# Altium PCB PCB CZAR Li-Ion Batt BOT.PcbDoc
Units mm, origin at the board's own origin, x right, y up, seen from the top; angles counter-clockwise.
Board outline 254 x 160 mm, 2 copper layers (L1, L2), stack 1.671 mm thick; 104 components, 48 nets, 345 pads, 0 vias.
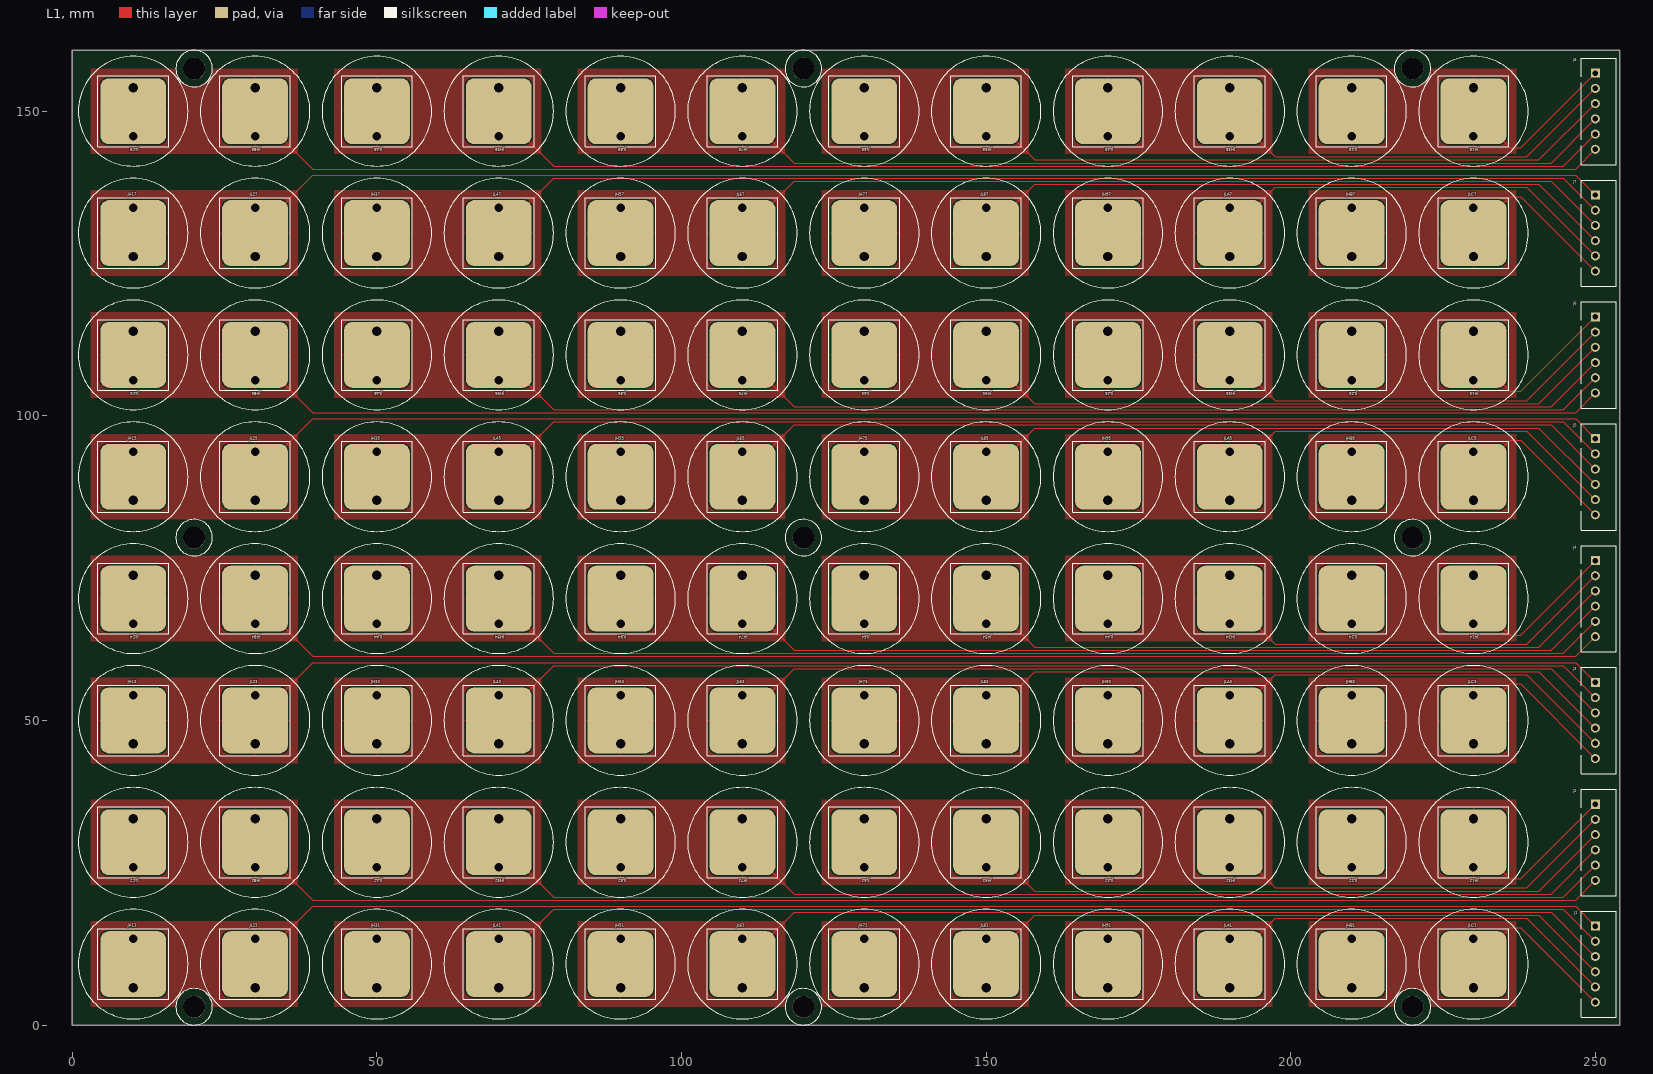
[diagram p0: L1 view]
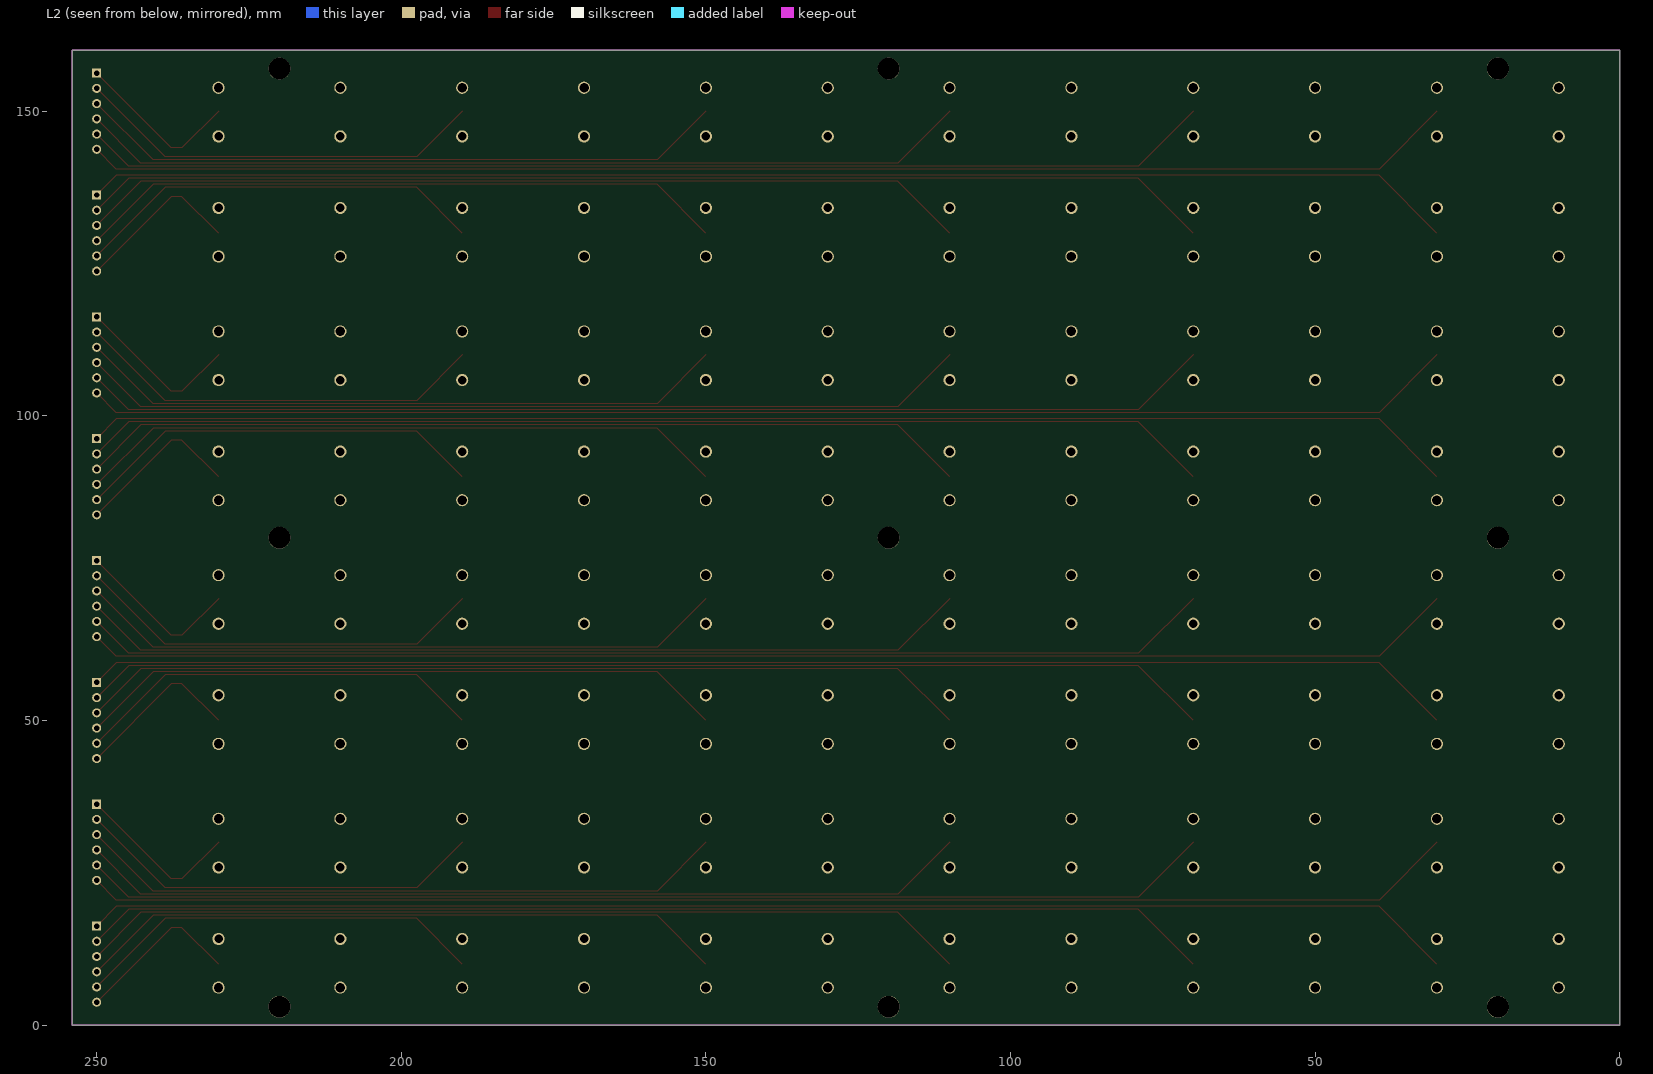
[diagram p1: L2 view, seen from below]

## Layer stack, top to bottom
L1: signal copper 0.0356
Dielectric: core 1.6, FR-4, Dk 4.8
L2: signal copper 0.0356

## Board outline
0,160 0,0 254,0 254,160

## Design rules (kind name [scope] priority, off if disabled: settings)
AssemblyTestPointUsage [All] p1: valid=2
AssemblyTestpoint [All] p1: testpointundercomponent=TRUE minsize=0.5 maxsize=2.54 preferedsize=1.524 minholesize=0 maxholesize=1.016 preferedholesize=0.813 testpointgrid=0.025 usegrid=FALSE gridtolerance=0 allowsidetop=TRUE allowsidebottom=TRUE
Clearance "Mounting Holes" [HoleSize = 3.6] p1: gap=1.2
Clearance LV2LV [All] p2: gap=0.2
ComponentClearance [All] p1: gap=0.2 collisioncheckmode=3 verticalgap=0.2 showdistances=FALSE
DiffPairsRouting [All] p1: maxlimit=2 minlimit=0.2 mostfreqgap=0.2 maxuncoupledlength=12.7
FabricationTestPointUsage [All] p1: valid=2 allowmultiple=FALSE
FabricationTestpoint [All] p1: side=3 testpointundercomponent=TRUE minsize=0.5 maxsize=2.54 preferedsize=1.524 minholesize=0 maxholesize=1.016 preferedholesize=0.813 testpointgrid=0.025 allowsidetop=TRUE allowsidebottom=TRUE usegrid=FALSE gridtolerance=0
Height [All] p1: minheight=0 maxheight=60 prefheight=12.7
HoleSize [All] p1: absolutevalues=TRUE maxlimit=25 minlimit=0.05 maxpercent=80.000 minpercent=20.000
HoleToHoleClearance [All] p1: gap=0.2 allowstackedmicrovias=TRUE
MinimumSolderMaskSliver [All] p1: minsoldermaskwidth=0.01
PlaneClearance [All] p1: clearance=0.5
PlaneConnect [All] p1: planeconnectstyle=Relief reliefexpansion=0.5 reliefentries=4 reliefconductorwidth=0.25 reliefairgap=0.25
PolygonConnect PolyConnect [All vs IsPolygon] p1: connectstyle=Relief reliefconductorwidth=0.2 reliefentries=4 polygonreliefangle="90 Angle"
RoomDefinition 8 [InComponentClass('8')] p1: confinementstyle=ConfineIn formatcopy=TRUE lockcomponents=FALSE outline 240,160 0,160 0,140 240,140
RoomDefinition 7 [InComponentClass('7')] p2: confinementstyle=ConfineIn formatcopy=TRUE lockcomponents=FALSE outline 0,120 240,120 240,140 0,140
RoomDefinition 6 [InComponentClass('6')] p3: confinementstyle=ConfineIn formatcopy=TRUE lockcomponents=FALSE outline 240,120 0,120 0,100 240,100
RoomDefinition 5 [InComponentClass('5')] p4: confinementstyle=ConfineIn formatcopy=TRUE lockcomponents=FALSE outline 0,80 240,80 240,100 0,100
RoomDefinition 4 [InComponentClass('4')] p5: confinementstyle=ConfineIn formatcopy=TRUE lockcomponents=FALSE outline 240,80 0,80 0,60 240,60
RoomDefinition 3 [InComponentClass('3')] p6: confinementstyle=ConfineIn formatcopy=TRUE lockcomponents=FALSE outline 0,40 240,40 240,60 0,60
RoomDefinition 2 [InComponentClass('2')] p7: confinementstyle=ConfineIn formatcopy=TRUE lockcomponents=FALSE outline 240,40 0,40 0,20 240,20
RoomDefinition 1 [InComponentClass('1')] p8: confinementstyle=ConfineIn formatcopy=TRUE lockcomponents=FALSE outline 0,0 240,0 240,20 0,20
RoutingVias [All] p1: holewidth=0.5 width=0.75 viastyle="Through Hole" minholewidth=0.381 minwidth=0.6 maxholewidth=1 maxwidth=1.25
SilkToSilkClearance [All] p1: silktosilkclearance=0.05
SilkscreenOverComponentPads [All] p1: minsilkscreentomaskgap=0.05
SolderMaskExpansion [All] p1: expansion=0.102
UnRoutedNet "Ignore 1V8" [Not InNet('+1V8')] p1:
UnRoutedNet [All] p2 off:
Width [All] p1: maxlimit=5 minlimit=0.2 preferedwidth=0.2
13 further rules are at their usual default settings.

## Classes and differential pairs
component class 1: JH11 JH31 JH51 JH71 JH91 JHB1 JL21 JL41 JL61 JL81 JLA1 JLC1
component class 2: JH12 JH32 JH52 JH72 JH92 JHB2 JL22 JL42 JL62 JL82 JLA2 JLC2
component class 3: JH13 JH33 JH53 JH73 JH93 JHB3 JL23 JL43 JL63 JL83 JLA3 JLC3
component class 4: JH14 JH34 JH54 JH74 JH94 JHB4 JL24 JL44 JL64 JL84 JLA4 JLC4
component class 5: JH15 JH35 JH55 JH75 JH95 JHB5 JL25 JL45 JL65 JL85 JLA5 JLC5
component class 6: JH16 JH36 JH56 JH76 JH96 JHB6 JL26 JL46 JL66 JL86 JLA6 JLC6
component class 7: JH17 JH37 JH57 JH77 JH97 JHB7 JL27 JL47 JL67 JL87 JLA7 JLC7
component class 8: JH18 JH38 JH58 JH78 JH98 JHB8 JL28 JL48 JL68 JL88 JLA8 JLC8
channel class "SCH Pg2 Cell Bank": 1 2 3 4 5 6 7 8

## Components (designator, comment, footprint, x,y, rotation, side; value= is the part's Value field where it differs from the comment)
J1 "B6B-XH-A(LF)(SN)" JST-XH-B6 250,10 r270 top
J2 "B6B-XH-A(LF)(SN)" JST-XH-B6 250,30 r270 top
J3 "B6B-XH-A(LF)(SN)" JST-XH-B6 250,50 r270 top
J4 "B6B-XH-A(LF)(SN)" JST-XH-B6 250,70 r270 top
J5 "B6B-XH-A(LF)(SN)" JST-XH-B6 250,90 r270 top
J6 "B6B-XH-A(LF)(SN)" JST-XH-B6 250,110 r270 top
J7 "B6B-XH-A(LF)(SN)" JST-XH-B6 250,130 r270 top
J8 "B6B-XH-A(LF)(SN)" JST-XH-B6 250,150 r270 top
JH11 "5202" BAT-KS5202-PTH 10,10 r0 top (schematic designator JH1)
JH12 "5202" BAT-KS5202-PTH 230,30 r180 top (schematic designator JH1)
JH13 "5202" BAT-KS5202-PTH 10,50 r0 top (schematic designator JH1)
JH14 "5202" BAT-KS5202-PTH 230,70 r180 top (schematic designator JH1)
JH15 "5202" BAT-KS5202-PTH 10,90 r0 top (schematic designator JH1)
JH16 "5202" BAT-KS5202-PTH 230,110 r180 top (schematic designator JH1)
JH17 "5202" BAT-KS5202-PTH 10,130 r0 top (schematic designator JH1)
JH18 "5202" BAT-KS5202-PTH 230,150 r180 top (schematic designator JH1)
JH31 "5202" BAT-KS5202-PTH 50,10 r0 top (schematic designator JH3)
JH32 "5202" BAT-KS5202-PTH 190,30 r180 top (schematic designator JH3)
JH33 "5202" BAT-KS5202-PTH 50,50 r0 top (schematic designator JH3)
JH34 "5202" BAT-KS5202-PTH 190,70 r180 top (schematic designator JH3)
JH35 "5202" BAT-KS5202-PTH 50,90 r0 top (schematic designator JH3)
JH36 "5202" BAT-KS5202-PTH 190,110 r180 top (schematic designator JH3)
JH37 "5202" BAT-KS5202-PTH 50,130 r0 top (schematic designator JH3)
JH38 "5202" BAT-KS5202-PTH 190,150 r180 top (schematic designator JH3)
JH51 "5202" BAT-KS5202-PTH 90,10 r0 top (schematic designator JH5)
JH52 "5202" BAT-KS5202-PTH 150,30 r180 top (schematic designator JH5)
JH53 "5202" BAT-KS5202-PTH 90,50 r0 top (schematic designator JH5)
JH54 "5202" BAT-KS5202-PTH 150,70 r180 top (schematic designator JH5)
JH55 "5202" BAT-KS5202-PTH 90,90 r0 top (schematic designator JH5)
JH56 "5202" BAT-KS5202-PTH 150,110 r180 top (schematic designator JH5)
JH57 "5202" BAT-KS5202-PTH 90,130 r0 top (schematic designator JH5)
JH58 "5202" BAT-KS5202-PTH 150,150 r180 top (schematic designator JH5)
JH71 "5202" BAT-KS5202-PTH 130,10 r0 top (schematic designator JH7)
JH72 "5202" BAT-KS5202-PTH 110,30 r180 top (schematic designator JH7)
JH73 "5202" BAT-KS5202-PTH 130,50 r0 top (schematic designator JH7)
JH74 "5202" BAT-KS5202-PTH 110,70 r180 top (schematic designator JH7)
JH75 "5202" BAT-KS5202-PTH 130,90 r0 top (schematic designator JH7)
JH76 "5202" BAT-KS5202-PTH 110,110 r180 top (schematic designator JH7)
JH77 "5202" BAT-KS5202-PTH 130,130 r0 top (schematic designator JH7)
JH78 "5202" BAT-KS5202-PTH 110,150 r180 top (schematic designator JH7)
JH91 "5202" BAT-KS5202-PTH 170,10 r0 top (schematic designator JH9)
JH92 "5202" BAT-KS5202-PTH 70,30 r180 top (schematic designator JH9)
JH93 "5202" BAT-KS5202-PTH 170,50 r0 top (schematic designator JH9)
JH94 "5202" BAT-KS5202-PTH 70,70 r180 top (schematic designator JH9)
JH95 "5202" BAT-KS5202-PTH 170,90 r0 top (schematic designator JH9)
JH96 "5202" BAT-KS5202-PTH 70,110 r180 top (schematic designator JH9)
JH97 "5202" BAT-KS5202-PTH 170,130 r0 top (schematic designator JH9)
JH98 "5202" BAT-KS5202-PTH 70,150 r180 top (schematic designator JH9)
JHB1 "5202" BAT-KS5202-PTH 210,10 r0 top (schematic designator JHB)
JHB2 "5202" BAT-KS5202-PTH 30,30 r180 top (schematic designator JHB)
JHB3 "5202" BAT-KS5202-PTH 210,50 r0 top (schematic designator JHB)
JHB4 "5202" BAT-KS5202-PTH 30,70 r180 top (schematic designator JHB)
JHB5 "5202" BAT-KS5202-PTH 210,90 r0 top (schematic designator JHB)
JHB6 "5202" BAT-KS5202-PTH 30,110 r180 top (schematic designator JHB)
JHB7 "5202" BAT-KS5202-PTH 210,130 r0 top (schematic designator JHB)
JHB8 "5202" BAT-KS5202-PTH 30,150 r180 top (schematic designator JHB)
JL21 "5202" BAT-KS5202-PTH 30,10 r0 top (schematic designator JL2)
JL22 "5202" BAT-KS5202-PTH 210,30 r180 top (schematic designator JL2)
JL23 "5202" BAT-KS5202-PTH 30,50 r0 top (schematic designator JL2)
JL24 "5202" BAT-KS5202-PTH 210,70 r180 top (schematic designator JL2)
JL25 "5202" BAT-KS5202-PTH 30,90 r0 top (schematic designator JL2)
JL26 "5202" BAT-KS5202-PTH 210,110 r180 top (schematic designator JL2)
JL27 "5202" BAT-KS5202-PTH 30,130 r0 top (schematic designator JL2)
JL28 "5202" BAT-KS5202-PTH 210,150 r180 top (schematic designator JL2)
JL41 "5202" BAT-KS5202-PTH 70,10 r0 top (schematic designator JL4)
JL42 "5202" BAT-KS5202-PTH 170,30 r180 top (schematic designator JL4)
JL43 "5202" BAT-KS5202-PTH 70,50 r0 top (schematic designator JL4)
JL44 "5202" BAT-KS5202-PTH 170,70 r180 top (schematic designator JL4)
JL45 "5202" BAT-KS5202-PTH 70,90 r0 top (schematic designator JL4)
JL46 "5202" BAT-KS5202-PTH 170,110 r180 top (schematic designator JL4)
JL47 "5202" BAT-KS5202-PTH 70,130 r0 top (schematic designator JL4)
JL48 "5202" BAT-KS5202-PTH 170,150 r180 top (schematic designator JL4)
JL61 "5202" BAT-KS5202-PTH 110,10 r0 top (schematic designator JL6)
JL62 "5202" BAT-KS5202-PTH 130,30 r180 top (schematic designator JL6)
JL63 "5202" BAT-KS5202-PTH 110,50 r0 top (schematic designator JL6)
JL64 "5202" BAT-KS5202-PTH 130,70 r180 top (schematic designator JL6)
JL65 "5202" BAT-KS5202-PTH 110,90 r0 top (schematic designator JL6)
JL66 "5202" BAT-KS5202-PTH 130,110 r180 top (schematic designator JL6)
JL67 "5202" BAT-KS5202-PTH 110,130 r0 top (schematic designator JL6)
JL68 "5202" BAT-KS5202-PTH 130,150 r180 top (schematic designator JL6)
JL81 "5202" BAT-KS5202-PTH 150,10 r0 top (schematic designator JL8)
JL82 "5202" BAT-KS5202-PTH 90,30 r180 top (schematic designator JL8)
JL83 "5202" BAT-KS5202-PTH 150,50 r0 top (schematic designator JL8)
JL84 "5202" BAT-KS5202-PTH 90,70 r180 top (schematic designator JL8)
JL85 "5202" BAT-KS5202-PTH 150,90 r0 top (schematic designator JL8)
JL86 "5202" BAT-KS5202-PTH 90,110 r180 top (schematic designator JL8)
JL87 "5202" BAT-KS5202-PTH 150,130 r0 top (schematic designator JL8)
JL88 "5202" BAT-KS5202-PTH 90,150 r180 top (schematic designator JL8)
JLA1 "5202" BAT-KS5202-PTH 190,10 r0 top (schematic designator JLA)
JLA2 "5202" BAT-KS5202-PTH 50,30 r180 top (schematic designator JLA)
JLA3 "5202" BAT-KS5202-PTH 190,50 r0 top (schematic designator JLA)
JLA4 "5202" BAT-KS5202-PTH 50,70 r180 top (schematic designator JLA)
JLA5 "5202" BAT-KS5202-PTH 190,90 r0 top (schematic designator JLA)
JLA6 "5202" BAT-KS5202-PTH 50,110 r180 top (schematic designator JLA)
JLA7 "5202" BAT-KS5202-PTH 190,130 r0 top (schematic designator JLA)
JLA8 "5202" BAT-KS5202-PTH 50,150 r180 top (schematic designator JLA)
JLC1 "5202" BAT-KS5202-PTH 230,10 r0 top (schematic designator JLC)
JLC2 "5202" BAT-KS5202-PTH 10,30 r180 top (schematic designator JLC)
JLC3 "5202" BAT-KS5202-PTH 230,50 r0 top (schematic designator JLC)
JLC4 "5202" BAT-KS5202-PTH 10,70 r180 top (schematic designator JLC)
JLC5 "5202" BAT-KS5202-PTH 230,90 r0 top (schematic designator JLC)
JLC6 "5202" BAT-KS5202-PTH 10,110 r180 top (schematic designator JLC)
JLC7 "5202" BAT-KS5202-PTH 230,130 r0 top (schematic designator JLC)
JLC8 "5202" BAT-KS5202-PTH 10,150 r180 top (schematic designator JLC)

## Footprints (in the part's own frame and the unit in brackets; to place one, negate y for a bottom-side part, rotate by r counter-clockwise, add the part's x,y. Pads: shape width x height; smd on the part's side, far side on the other; paste and mask are expansions set on the pad)
BAT-KS5202-PTH [mm] "Battery Contact Spring, 10.8x10.8x8.5mm (LxWxH)"
  round 2 hole 1.55: 1(0,-3.848)
  rrect25% 10.8x10.8 smd: 1(0,0)
  round 2 hole 1.4: 1(0,4.127)
  silkscreen extent -9,-9 9,9, body extent -5.4,-5.4 5.4,5.4, height 8.5
JST-XH-B6 [mm] "Locking Connector; Top-Entry; Header; 6-Pin, 2.5mm pitch"
  rect 1.5x1.5 hole 0.9: 1(-6.25,0)
  round 1.5 hole 0.9: 2(-3.75,0) 3(-1.25,0) 4(1.25,0) 5(3.75,0) 6(6.25,0)
  silkscreen extent -8.7,-2.35 8.75,3.4, body extent -8.7,-2.35 8.75,3.4, height 7

## Part data
J1 J2 J3 J4 J5 J6 J7 J8: library part "JST B6B-XH-A", "Header, JST, 6-Pin, Straight"
JH11 JH12 JH13 JH14 JH15 JH16 JH17 JH18 JH31 JH32 JH33 JH34 JH35 JH36 JH37 JH38 JH51 JH52 JH53 JH54 JH55 JH56 JH57 JH58 JH71 JH72 JH73 JH74 JH75 JH76 JH77 JH78 JH91 JH92 JH93 JH94 JH95 JH96 JH97 JH98 JHB1 JHB2 JHB3 JHB4 JHB5 JHB6 JHB7 JHB8 JL21 JL22 JL23 JL24 JL25 JL26 JL27 JL28 JL41 JL42 JL43 JL44 JL45 JL46 JL47 JL48 JL61 JL62 JL63 JL64 JL65 JL66 JL67 JL68 JL81 JL82 JL83 JL84 JL85 JL86 JL87 JL88 JLA1 JLA2 JLA3 JLA4 JLA5 JLA6 JLA7 JLA8 JLC1 JLC2 JLC3 JLC4 JLC5 JLC6 JLC7 JLC8: library part KS5202, "Hardware, Battery Contact Spring, PCB-mount"

## Free pads (board coordinates)
  round 3.6 hole 3.6 unplated: ""(20,80) ""(20,157) ""(20,3) ""(120,3) ""(120,80) ""(120,157) ""(220,3) ""(220,80) ""(220,157)

## Nets (pads, with @x,y where several pads share a name; then routed paths per layer and width w, separated by ;. In a path a pad name is that pad's centre, name@x,y a point inside that pad or via, vN(x,y) a via of type N, cw(c..) or ccw(c..) an arc to the next point about the centre after c; other vN are vias at no path point)
C01: J1.1 JH11.1 JL21.1 | length 225.3
  L1 w0.2: JL21.1@30,10 39.5,19.5 246.75,19.5 J1.1
C03: J1.2 JH31.1 JL41.1 | length 185.9
  L1 w0.2: JL41.1@70,10 79,19 244.75,19 J1.2
C05: J1.3 JH51.1 JL61.1 | length 146.5
  L1 w0.2: JL61.1@110,10 118.5,18.5 242.75,18.5 J1.3
C07: J1.4 JH71.1 JL81.1 | length 107.1
  L1 w0.2: JL81.1@150,10 158,18 240.75,18 J1.4
C09: J1.5 JH91.1 JLA1.1 | length 67.8
  L1 w0.2: JLA1.1@190,10 197.5,17.5 238.75,17.5 J1.5
C11: J1.6 JHB1.1 JLC1.1 | length 27.6
  L1 w0.2: JLC1.1@230,10 236,16 237.75,16 J1.6
C13: J2.1 JH12.1 JL22.1 | length 27.6
  L1 w0.2: JH12.1@230,30 236,24 237.75,24 J2.1
C15: J2.2 JH32.1 JL42.1 | length 67.8
  L1 w0.2: JH32.1@190,30 197.5,22.5 238.75,22.5 J2.2
C17: J2.3 JH52.1 JL62.1 | length 107.1
  L1 w0.2: JH52.1@150,30 158,22 240.75,22 J2.3
C19: J2.4 JH72.1 JL82.1 | length 146.5
  L1 w0.2: JH72.1@110,30 118.5,21.5 242.75,21.5 J2.4
C21: J2.5 JH92.1 JLA2.1 | length 185.9
  L1 w0.2: JH92.1@70,30 79,21 244.75,21 J2.5
C23: J2.6 JHB2.1 JLC2.1 | length 225.3
  L1 w0.2: JHB2.1@30,30 39.5,20.5 246.75,20.5 J2.6
C25: J3.1 JH13.1 JL23.1 | length 225.3
  L1 w0.2: JL23.1@30,50 39.5,59.5 246.75,59.5 J3.1
C27: J3.2 JH33.1 JL43.1 | length 185.9
  L1 w0.2: JL43.1@70,50 79,59 244.75,59 J3.2
C29: J3.3 JH53.1 JL63.1 | length 146.5
  L1 w0.2: JL63.1@110,50 118.5,58.5 242.75,58.5 J3.3
C31: J3.4 JH73.1 JL83.1 | length 107.1
  L1 w0.2: JL83.1@150,50 158,58 240.75,58 J3.4
C33: J3.5 JH93.1 JLA3.1 | length 67.8
  L1 w0.2: JLA3.1@190,50 197.5,57.5 238.75,57.5 J3.5
C35: J3.6 JHB3.1 JLC3.1 | length 27.6
  L1 w0.2: JLC3.1@230,50 236,56 237.75,56 J3.6
C37: J4.1 JH14.1 JL24.1 | length 27.6
  L1 w0.2: JH14.1@230,70 236,64 237.75,64 J4.1
C39: J4.2 JH34.1 JL44.1 | length 67.8
  L1 w0.2: JH34.1@190,70 197.5,62.5 238.75,62.5 J4.2
C41: J4.3 JH54.1 JL64.1 | length 107.1
  L1 w0.2: JH54.1@150,70 158,62 240.75,62 J4.3
C43: J4.4 JH74.1 JL84.1 | length 146.5
  L1 w0.2: JH74.1@110,70 118.5,61.5 242.75,61.5 J4.4
C45: J4.5 JH94.1 JLA4.1 | length 185.9
  L1 w0.2: JH94.1@70,70 79,61 244.75,61 J4.5
C47: J4.6 JHB4.1 JLC4.1 | length 225.3
  L1 w0.2: JHB4.1@30,70 39.5,60.5 246.75,60.5 J4.6
C49: J5.1 JH15.1 JL25.1 | length 225.3
  L1 w0.2: JL25.1@30,90 39.5,99.5 246.75,99.5 J5.1
C51: J5.2 JH35.1 JL45.1 | length 185.9
  L1 w0.2: JL45.1@70,90 79,99 244.75,99 J5.2
C53: J5.3 JH55.1 JL65.1 | length 146.5
  L1 w0.2: JL65.1@110,90 118.5,98.5 242.75,98.5 J5.3
C55: J5.4 JH75.1 JL85.1 | length 107.1
  L1 w0.2: JL85.1@150,90 158,98 240.75,98 J5.4
C57: J5.5 JH95.1 JLA5.1 | length 67.8
  L1 w0.2: JLA5.1@190,90 197.5,97.5 238.75,97.5 J5.5
C59: J5.6 JHB5.1 JLC5.1 | length 27.6
  L1 w0.2: JLC5.1@230,90 236,96 237.75,96 J5.6
C61: J6.1 JH16.1 JL26.1 | length 27.6
  L1 w0.2: JH16.1@230,110 236,104 237.75,104 J6.1
C63: J6.2 JH36.1 JL46.1 | length 67.8
  L1 w0.2: JH36.1@190,110 197.5,102.5 238.75,102.5 J6.2
C65: J6.3 JH56.1 JL66.1 | length 107.1
  L1 w0.2: JH56.1@150,110 158,102 240.75,102 J6.3
C67: J6.4 JH76.1 JL86.1 | length 146.5
  L1 w0.2: JH76.1@110,110 118.5,101.5 242.75,101.5 J6.4
C69: J6.5 JH96.1 JLA6.1 | length 185.9
  L1 w0.2: JH96.1@70,110 79,101 244.75,101 J6.5
C71: J6.6 JHB6.1 JLC6.1 | length 225.3
  L1 w0.2: JHB6.1@30,110 39.5,100.5 246.75,100.5 J6.6
C73: J7.1 JH17.1 JL27.1 | length 225.3
  L1 w0.2: JL27.1@30,130 39.5,139.5 246.75,139.5 J7.1
C75: J7.2 JH37.1 JL47.1 | length 185.9
  L1 w0.2: JL47.1@70,130 79,139 244.75,139 J7.2
C77: J7.4 JH77.1 JL87.1 | length 107.1
  L1 w0.2: JL87.1@150,130 158,138 240.75,138 J7.4
C79: J7.3 JH57.1 JL67.1 | length 146.5
  L1 w0.2: JL67.1@110,130 118.5,138.5 242.75,138.5 J7.3
C81: J7.5 JH97.1 JLA7.1 | length 67.8
  L1 w0.2: JLA7.1@190,130 197.5,137.5 238.75,137.5 J7.5
C83: J7.6 JHB7.1 JLC7.1 | length 27.6
  L1 w0.2: JLC7.1@230,130 236,136 237.75,136 J7.6
C85: J8.1 JH18.1 JL28.1 | length 27.6
  L1 w0.2: JH18.1@230,150 236,144 237.75,144 J8.1
C87: J8.2 JH38.1 JL48.1 | length 67.8
  L1 w0.2: JH38.1@190,150 197.5,142.5 238.75,142.5 J8.2
C89: J8.3 JH58.1 JL68.1 | length 107.1
  L1 w0.2: JH58.1@150,150 158,142 240.75,142 J8.3
C91: J8.4 JH78.1 JL88.1 | length 146.5
  L1 w0.2: JH78.1@110,150 118.5,141.5 242.75,141.5 J8.4
C93: J8.5 JH98.1 JLA8.1 | length 185.9
  L1 w0.2: JH98.1@70,150 79,141 244.75,141 J8.5
C95: J8.6 JHB8.1 JLC8.1 | length 225.3
  L1 w0.2: JHB8.1@30,150 39.5,140.5 246.75,140.5 J8.6

## Polygon pours and split planes (outlines as drawn)
C95 on L1 "C95" (solid, remove dead copper): 3,157 37,157 37,143 3,143
C93 on L1 "C93" (solid, remove dead copper): 43,157 77,157 77,143 43,143
C91 on L1 "C91" (solid, remove dead copper): 83,157 117,157 117,143 83,143
C89 on L1 "C89" (solid, remove dead copper): 123,157 157,157 157,143 123,143
C87 on L1 "C87" (solid, remove dead copper): 163,157 197,157 197,143 163,143
C85 on L1 "C85" (solid, remove dead copper): 203,157 237,157 237,143 203,143
C73 on L1 "C73" (solid, remove dead copper): 3,137 37,137 37,123 3,123
C75 on L1 "C75" (solid, remove dead copper): 43,137 77,137 77,123 43,123
C79 on L1 "C79" (solid, remove dead copper): 83,137 117,137 117,123 83,123
C77 on L1 "C77" (solid, remove dead copper): 123,137 157,137 157,123 123,123
C81 on L1 "C81" (solid, remove dead copper): 163,137 197,137 197,123 163,123
C83 on L1 "C83" (solid, remove dead copper): 203,137 237,137 237,123 203,123
C71 on L1 "C71" (solid, remove dead copper): 3,117 37,117 37,103 3,103
C69 on L1 "C69" (solid, remove dead copper): 43,117 77,117 77,103 43,103
C67 on L1 "C67" (solid, remove dead copper): 83,117 117,117 117,103 83,103
C65 on L1 "C65" (solid, remove dead copper): 123,117 157,117 157,103 123,103
C63 on L1 "C63" (solid, remove dead copper): 163,117 197,117 197,103 163,103
C61 on L1 "C61" (solid, remove dead copper): 203,117 237,117 237,103 203,103
C49 on L1 "C49" (solid, remove dead copper): 3,97 37,97 37,83 3,83
C51 on L1 "C51" (solid, remove dead copper): 43,97 77,97 77,83 43,83
C53 on L1 "C53" (solid, remove dead copper): 83,97 117,97 117,83 83,83
C55 on L1 "C55" (solid, remove dead copper): 123,97 157,97 157,83 123,83
C57 on L1 "C57" (solid, remove dead copper): 163,97 197,97 197,83 163,83
C59 on L1 "C59" (solid, remove dead copper): 203,97 237,97 237,83 203,83
C47 on L1 "C47" (solid, remove dead copper): 3,77 37,77 37,63 3,63
C45 on L1 "C45" (solid, remove dead copper): 43,77 77,77 77,63 43,63
C43 on L1 "C43" (solid, remove dead copper): 83,77 117,77 117,63 83,63
C41 on L1 "C41" (solid, remove dead copper): 123,77 157,77 157,63 123,63
C39 on L1 "C39" (solid, remove dead copper): 163,77 197,77 197,63 163,63
C37 on L1 "C37" (solid, remove dead copper): 203,77 237,77 237,63 203,63
C25 on L1 "C25" (solid, remove dead copper): 3,57 37,57 37,43 3,43
C27 on L1 "C27" (solid, remove dead copper): 43,57 77,57 77,43 43,43
C29 on L1 "C29" (solid, remove dead copper): 83,57 117,57 117,43 83,43
C31 on L1 "C31" (solid, remove dead copper): 123,57 157,57 157,43 123,43
C33 on L1 "C33" (solid, remove dead copper): 163,57 197,57 197,43 163,43
C35 on L1 "C35" (solid, remove dead copper): 203,57 237,57 237,43 203,43
C23 on L1 "C23" (solid, remove dead copper): 3,37 37,37 37,23 3,23
C21 on L1 "C21" (solid, remove dead copper): 43,37 77,37 77,23 43,23
C19 on L1 "C19" (solid, remove dead copper): 83,37 117,37 117,23 83,23
C17 on L1 "C17" (solid, remove dead copper): 123,37 157,37 157,23 123,23
C15 on L1 "C15" (solid, remove dead copper): 163,37 197,37 197,23 163,23
C13 on L1 "C13" (solid, remove dead copper): 203,37 237,37 237,23 203,23
C11 on L1 "C11" (solid, remove dead copper): 203,17 237,17 237,3 203,3
C09 on L1 "C09" (solid, remove dead copper): 163,17 197,17 197,3 163,3
C07 on L1 "C07" (solid, remove dead copper): 123,17 157,17 157,3 123,3
C05 on L1 "C05" (solid, remove dead copper): 83,17 117,17 117,3 83,3
C03 on L1 "C03" (solid, remove dead copper): 43,17 77,17 77,3 43,3
C01 on L1 "C01" (solid, remove dead copper): 3,17 37,17 37,3 3,3

## Keep-outs
Keep-Out Layer:
  the board outline again, w0.2

## Silkscreen, mask and mechanical layers (free items; w line width, h text height)
Top Overlay:
  circle w0.2: c120,80 r3
  circle w0.2: c20,80 r3
  circle w0.2: c20,3 r3
  circle w0.2: c120,3 r3
  circle w0.2: c220,3 r3
  circle w0.2: c220,80 r3
  circle w0.2: c220,157 r3
  circle w0.2: c20,157 r3
  circle w0.2: c120,157 r3

## Dimensions
0,160 to 0,0 on Mechanical 1
0,0 to 254,0 on Mechanical 1
0,160 to 0,0 on Mechanical 1
0,0 to 254,0 on Mechanical 1